# Altium PCB LoRa_Node.PcbDoc
Units mil, origin at the board's own origin, x right, y up, seen from the top; angles counter-clockwise.
Board outline 6000 x 4000 mil, 2 copper layers (Top Layer, Bottom Layer); 76 components, 60 nets, 297 pads, 0 vias.
Unrouted connection lines stored in the file: 200.
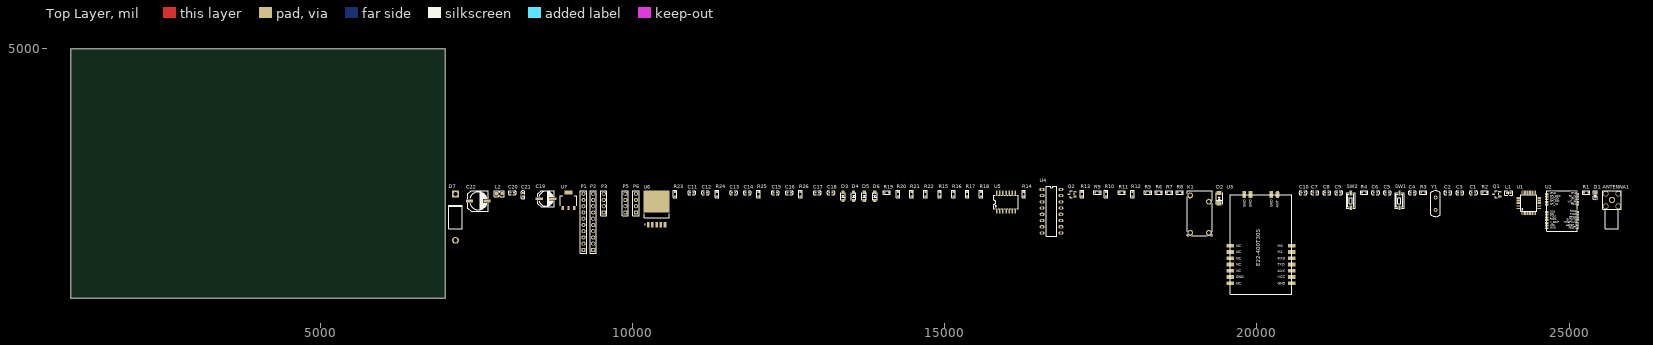
[diagram p0: Top Layer view]
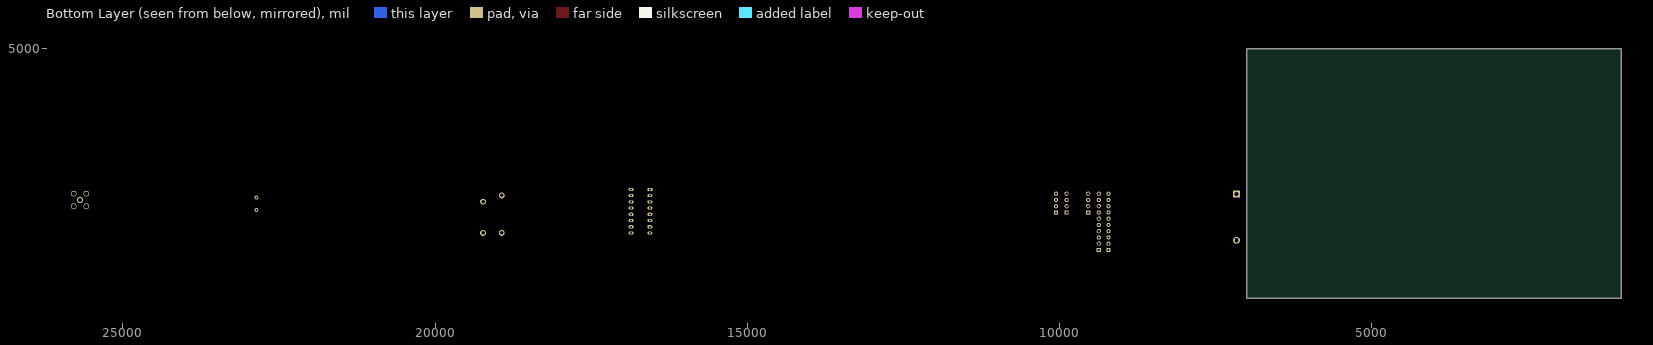
[diagram p1: Bottom Layer view, seen from below]

## Layer stack, top to bottom
Top Solder: solder mask 0.4, Solder Resist, Dk 3.5
Top Layer: signal copper 1.4
Dielectric 1: dielectric 12.6, FR-4, Dk 4.8
Bottom Layer: signal copper 1.4
Bottom Solder: solder mask 0.4, Solder Resist, Dk 3.5

## Board outline
1000,1000 7000,1000 7000,5000 1000,5000

## Design rules (kind name [scope] priority, off if disabled: settings)
Clearance [All] p1: gap=10 ignorepadtopadclearanceinfootprint=FALSE except(0: Arc-Hole Track-Hole SMDPad-Hole THPad-Hole Via-Hole Fill-Hole Poly-Hole Region-Hole Text-Hole)
PolygonConnect [All] p1: connectstyle=Relief reliefconductorwidth=10 reliefentries=4 polygonreliefangle="90 Angle" airgapwidth=10
RoomDefinition LoRa_Node [InComponentClass('LoRa_Node')] p1: confinementstyle=ConfineIn formatcopy=TRUE lockcomponents=FALSE outline 7045,1060 25995,1060 25995,2835 7045,2835
RoutingVias [All] p1: holewidth=28 width=50 viastyle="Through Hole" minholewidth=28 minwidth=50 maxholewidth=28 maxwidth=50
SolderMaskExpansion [All] p1: expansion=4
Width [All] p1: maxlimit=10 minlimit=10 preferedwidth=10
30 further rules are at their usual default settings.

## Components (designator, comment, footprint, x,y, rotation, side; value= is the part's Value field where it differs from the comment)
ANTENNA1 "Active antenna" SMA-W 25685,2575 r90 top
C1 "Cap8" 0603C 23445,2690 r0 top value=20pF
C2 "Cap15" 0603C 23035,2690 r0 top value=10uF
C3 "Cap16" 0603C 23225,2690 r0 top value=100nF
C4 "Cap17" 0603C 22465,2690 r0 top value=100nF
C5 "Cap9" 0603C 22065,2690 r0 top value=20pF
C6 "Cap18" 0603C 21875,2690 r0 top value=100nF
C7 "Cap11" 0603C 20905,2690 r0 top value=0.1uF
C8 "Cap12" 0603C 21095,2690 r0 top value=0.1uF
C9 "Cap13" 0603C 21285,2690 r0 top value=0.1uF
C10 "Cap10" 0603C 20715,2690 r0 top value=100nF
C11 "" 0603C 10925,2690 r0 top value=10uF
C12 "Cap" 0603C 11145,2690 r0 top value=0.01uF
C13 "" 0603C 11595,2690 r0 top value=10uF
C14 "Cap" 0603C 11815,2690 r0 top value=0.01uF
C15 "" 0603C 12265,2690 r0 top value=10uF
C16 "Cap" 0603C 12485,2690 r0 top value=0.01uF
C17 "" 0603C 12935,2690 r0 top value=10uF
C18 "Cap" 0603C 13155,2690 r0 top value=0.01uF
C19 "100uF" 100uF-16V 8415,2465 r0 top
C20 "" 0603C 8050,2690 r0 top value=10uF
C21 "" 0603C 8245,2635 r90 top value=10uF
C22 "1000uF" 1000uF-6.3V 7280,2410 r0 top
D1 "LED1" D0603 25415,2655 r90 top
D2 "S-SZA12A" S-SZA12A 19450,2450 r90 top
D3 "SM2T3V3A" 3.3V稳压二极管(LMSZ5226BT1G) 13415,2490 r90 top
D4 "SM2T3V3A" 3.3V稳压二极管(LMSZ5226BT1G) 13585,2490 r90 top
D5 "SM2T3V3A" 3.3V稳压二极管(LMSZ5226BT1G) 13755,2490 r90 top
D6 "SM2T3V3A" 3.3V稳压二极管(LMSZ5226BT1G) 13925,2490 r90 top
D7 "1N5822" DO-201AD 7165,2300 r90 top
K1 "32F/012-HS(551)" 32F/012-HS（551） 19345,1870 r90 top
L1 "Inductor3" 0603L 24010,2685 r0 top value=68nH
L2 "Inductor" L0805 7825,2675 r0 top value=100uH
P1 "A-R" HDR2.54-LI-10P 9215,2225 r90 top
P2 "D-V" HDR2.54-LI-10P 9370,2225 r90 top
P3 "Header 4" HDR2.54-LI-4P 9540,2525 r90 top
P5 "LoRa" HDR2.54-LI-4P 9885,2525 r90 top
P6 "GPS" HDR2.54-LI-4P 10055,2525 r90 top
Q1 "SI2302" FMMT493 23715,2605 r0 top
Q2 "FMMT493" FMMT493 16915,2605 r0 top
R1 "Res11" 0603R 25270,2695 r0 top value=510
R2 "Res9" 0603R 23650,2695 r0 top value=10K
R3 "Res8" 0603R 22665,2695 r0 top value=1M
R4 "Res10" 0603R 21715,2695 r0 top value=100K
R5 "Res1" 0603R 18255,2695 r0 top value=0
R6 "Res1" 0603R 18425,2695 r0 top value=0
R7 "Res1" 0603R 18595,2695 r0 top value=0
R8 "Res1" 0603R 18765,2695 r0 top value=0
R9 "Res1" 0603R 17445,2695 r0 top value=47
R10 "Res1" 0603R 17585,2670 r90 top value=47
R11 "Res1" 0603R 17835,2695 r0 top value=47
R12 "Res1" 0603R 18005,2670 r90 top value=47
R13 "Res11" 0603R 17195,2670 r90 top value=10K
R14 "Res11" 0603R 16265,2670 r90 top value=2K
R15 "Res1" 0603R 14920,2670 r90 top value=2K
R16 "Res1" 0603R 15140,2670 r90 top value=1M
R17 "Res1" 0603R 15360,2670 r90 top value=1M
R18 "Res1" 0603R 15580,2670 r90 top value=1M
R19 "Res1" 0603R 14070,2695 r0 top value=510
R20 "Res1" 0603R 14250,2670 r90 top value=510
R21 "Res1" 0603R 14470,2670 r90 top value=510
R22 "Res1" 0603R 14690,2670 r90 top value=510
R23 "Res1" 0603R 10680,2670 r90 top value=2K
R24 "Res1" 0603R 11350,2670 r90 top value=1M
R25 "Res1" 0603R 12020,2670 r90 top value=150K
R26 "Res1" 0603R 12690,2670 r90 top value=82K
SW1 "SW-1" SW-1 22280,2565 r90 top
SW2 "SW-1" SW-1 21500,2565 r90 top
U1 "STM32F103C8T6" stm32l151c8t6 24150,2360 r0 top
U2 "UM220-III N" UM220-III 25350,2300 r0 top
U3 "E22-400T30S" PE32(915T30S) 20555,1840 r90 top
U4 "TIL193" DIP16 16560,2745 r0 top
U5 "LM324AN" LM324AN 15710,2345 r0 top
U6 "LM2576SX-5.0/NOPB" LM2576SX-5.0/NOPB 10650,2140 r90 top
U7 "ASM1117-3.3V" SOT-223 8885,2445 r0 top
Y1 "8MHz" XTAL 22860,2410 r90 top

## Footprints (in the part's own frame and the unit in brackets; to place one, negate y for a bottom-side part, rotate by r counter-clockwise, add the part's x,y. Pads: shape width x height; smd on the part's side, far side on the other; paste and mask are expansions set on the pad)
3.3V稳压二极管(LMSZ5226BT1G) [mm]
  rect 1.3x1.3 smd: 1(1.92,1.154) 2(5.32,1.154)
  silkscreen extent 2.12,0.25 5.12,2.05
32F/012-HS（551） [mil]
  round 94.49 hole 55.12: 1(177.2,114.72) 2(177.2,413.92) 3(777.2,414.72) 4(677.2,114.72)
  silkscreen extent 129,64 854,465
100uF-16V [mm]
  rect 3x1 smd: 1(2.262,3.299) 2(7.862,3.299)
  silkscreen extent 1.77,0 8.36,6.6
0603C [mil]
  rect 30x30 smd: 1(-5,0) 2(50,0)
  silkscreen extent -42,-30 87,30
0603L [mil]
  rect 30x30 smd: 1(-5,0) 2(50,0)
  silkscreen extent -40,-35 85,35
0603R [mm]
  rect 0.762x0.9 smd: 1(-0.9,0)
  rect 0.8x0.9 smd: 2(0.9,0)
  silkscreen extent -1.45,-0.7 1.45,0.7, body extent -0.85,-0.4 0.85,0.4, height 0.56
1000uF-6.3V [mil]
  rect 114.2x47.2 smd: 1(112.1,148.8) 2(387.7,148.4)
  silkscreen extent 84,-15 411,312
D0603 [mm]
  rect 1x1 smd: 1(-0.94,0) 2(0.889,0)
  silkscreen extent -1.7,-0.76 1.65,0.76, body extent -1.03,-0.53 0.99,0.53, height 0.46
DIP16 [mil] "16脚300mil直插集成电路（蒜米工坊）"
  rect 80x50 hole 32: 1(0,0)
  oval 80x50 hole 32: 2(0,-100) 3(0,-200) 4(0,-300) 5(0,-400) 6(0,-500) 7(0,-600) 8(0,-700) 9(300,-700) 10(300,-600) 11(300,-500) 12(300,-400) 13(300,-300) 14(300,-200) 15(300,-100) 16(300,0)
  silkscreen extent 65,-750 235,50, body extent -8,-732 300,32, height 180
DO-201AD [mm] "Diode, Axial; Body 9.5 x 5.6 mm (LxDia. max), Lead Dia. 1.32 mm (max)"
  round 2.8 hole 1.7: 1(-9.42,0)
  rect 2.8x2.8 hole 1.7: 2(9.42,0)
  silkscreen extent -4.8,-2.8 4.9,2.8
FMMT493 [mm]
  rect 1.25x0.7 smd: 1(4.394,0.637) 2(4.394,2.537) 3(1.895,1.587)
  silkscreen extent 2.49,0.13 4.04,3.05
HDR2.54-LI-4P [mm] "排针，4脚"
  rect 1.7x1.7 hole 0.9: 1(-3.81,0)
  round 1.7 hole 0.9: 2(-1.27,0) 3(1.27,0) 4(3.81,0)
  silkscreen extent -5.08,-1.27 5.08,1.27, body extent -5.08,-1.27 5.08,1.27, height 8.5
HDR2.54-LI-10P [mm] "排针，10脚"
  rect 1.7x1.7 hole 0.9: 1(-11.43,0)
  round 1.7 hole 0.9: 2(-8.89,0) 3(-6.35,0) 4(-3.81,0) 5(-1.27,0) 6(1.27,0) 7(3.81,0) 8(6.35,0) 9(8.89,0) 10(11.43,0)
  silkscreen extent -12.7,-1.27 12.7,1.27, body extent -12.7,-1.27 12.7,1.27, height 8.5
L0805 [mil] "1/8W"
  rect 50x50 smd: 1(0,0) 2(82.3,0.2)
  silkscreen extent -40,-45 122,45, body extent 1,-24 80,25, height 22
LM324AN [mm]
  oval 0.6x2.198 smd: 1(3.095,1.353) 2(4.365,1.353) 3(5.635,1.353) 4(6.905,1.353) 5(8.175,1.353) 6(9.445,1.353) 7(10.715,1.353) 8(10.715,8.553) 9(9.445,8.553) 10(8.175,8.553) 11(6.905,8.553) 12(5.635,8.553) 13(4.365,8.553) 14(3.095,8.553)
  silkscreen extent 1.91,2.2 11.91,7.7
LM2576SX-5.0/NOPB [mil]
  rect 90x42.1 smd: 1(40,398.84) 2(40,331.84) 3(40,264.84) 4(40,197.84) 5(40,130.84)
  rect 350x419.68 smd: 6(407.54,264.84)
  silkscreen extent 36,65 212,465
PE32(915T30S) [mm] "40.5mm*25mm*3.80mm-S"
  rect 1.5x3 smd: 1(0,0) 2(-2.54,0) 3(-5.08,0) 4(-7.62,0) 5(-10.16,0) 6(-12.7,0) 7(-15.24,0) 8(-15.24,25) 9(-12.7,25) 10(-10.16,25) 11(-7.62,25) 12(-5.08,25) 13(-2.54,25) 14(0,25)
  rect 3x1.5 smd: 15(20.88,19.27) 16(20.88,16.73) 17(20.88,8.27)
  oval 3x1.5 smd: 18(20.88,5.73)
  silkscreen extent -19.62,0 20.88,25
S-SZA12A [mm]
  rect 1.8x2 smd: 1(1.789,1.4) 2(5.989,1.4)
  silkscreen extent 1.59,0 6.19,2.8
SMA-W [mil]
  round 100 hole 70: 1(0,0)
  round 90 hole 70: 2(-100,-100) 2(-100,100) 2(100,-100) 2(100,100)
  silkscreen extent -460,-152 148,151, body extent -460,-140 135,136, height 108
SOT-223 [mil]
  rect 39x59 smd: 1(0,0) 3(180,0)
  rect 38.98x59.05 smd: 2(90,0)
  rect 129.13x59 smd: 4(90,248.03)
  silkscreen extent -40,40 220,200
stm32l151c8t6 [mm]
  oval 0.3x1.5 smd: 1(2.377,-0.012) 2(2.877,-0.012) 3(3.377,-0.012) 4(3.877,-0.012) 5(4.377,-0.012) 6(4.877,-0.012) 7(5.377,-0.012) 8(5.877,-0.012) 9(6.377,-0.012) 10(6.877,-0.012) 11(7.377,-0.012) 12(7.877,-0.012) 25(7.877,8.488) 26(7.377,8.488) 27(6.877,8.488) 28(6.377,8.488) 29(5.877,8.488) 30(5.377,8.488) 31(4.877,8.488) 32(4.377,8.488) 33(3.877,8.488) 34(3.377,8.488) 35(2.877,8.488) 36(2.377,8.488)
  oval 1.5x0.3 smd: 13(9.377,1.488) 14(9.377,1.988) 15(9.377,2.488) 16(9.377,2.988) 17(9.377,3.488) 18(9.377,3.988) 19(9.377,4.488) 20(9.377,4.988) 21(9.377,5.488) 22(9.377,5.988) 23(9.377,6.488) 24(9.377,6.988) 37(0.877,6.988) 38(0.877,6.488) 39(0.877,5.988) 40(0.877,5.488) 41(0.877,4.988) 42(0.877,4.488) 43(0.877,3.988) 44(0.877,3.488) 45(0.877,2.988) 46(0.877,2.488) 47(0.877,1.988) 48(0.877,1.488)
  silkscreen extent 1.8,0.92 8.43,7.58
SW-1 [mm]
  rect 2x1 smd: 1(-2.937,-0.055) 2(3.063,-0.055)
  silkscreen extent -3.04,-1.9 3.16,1.8
UM220-III [mm]
  rect 1.5x0.8 smd: 1(-5.634,-4.527) 2(-5.634,-3.427) 3(-5.634,-2.327) 4(-5.634,-1.227) 5(-5.634,-0.127) 6(-5.634,0.973) 7(-5.634,2.073) 8(-5.634,5.073) 9(-5.634,6.173) 10(-5.634,7.273) 11(-5.634,8.373) 12(-5.634,9.473) 13(-18.034,9.473) 14(-18.034,8.373) 15(-18.034,7.273) 16(-18.034,6.173) 17(-18.034,5.073) 18(-18.034,2.073) 19(-18.034,0.973) 20(-18.034,-0.127) 21(-18.034,-1.227) 22(-18.034,-2.327) 23(-18.034,-3.427) 24(-18.034,-4.527)
  silkscreen extent -18.03,-5.73 -5.63,10.67
XTAL [mil]
  round 62 hole 32: 1(5,0) 2(205,0)
  silkscreen extent -101,-75 311,75

## Part data
C1 C2 C3 C4 C5 C6 C7 C8 C9 C10: library part Cap, "Capacitor", LatestRevisionDate=17-Jul-2002, LatestRevisionNote="Re-released for DXP Platform.", PackageDescription="Radial Cap, Thru-Hole; 2 Leads; 0.3 in Pin Spacing", PackageReference=RAD-0.3, Published=8-Jun-2000, Publisher="Altium Limited"
C11 C13 C15 C17 C20 C21: library part "Cap Pol1", "Polarized Capacitor (Radial)", LatestRevisionDate=17-Jul-2002, LatestRevisionNote="Re-released for DXP Platform.", PackageDescription="Polarized Capacitor (Radial); 2 Leads", PackageReference=RB7.6-15, Published=8-Jun-2000, Publisher="Altium Limited"
C12 C14 C16 C18: "无极性电容", LatestRevisionDate=17-Jul-2002, LatestRevisionNote="Re-released for DXP Platform.", PackageReference=RAD-0.3, Published=8-Jun-2000, Publisher="Altium Limited"
C19 C22: library part "Cap Pol2", "Polarized Capacitor (Axial)", LatestRevisionDate=17-Jul-2002, LatestRevisionNote="Re-released for DXP Platform.", PackageDescription="Polarized Capacitor; 2 Leads", PackageReference=POLAR0.8, Published=8-Jun-2000, Publisher="Altium Limited"
D1: "Typical RED GaAs LED", LatestRevisionDate=08-Jul-2005, LatestRevisionNote="Mech Layer 1 removed.", PackageDescription="LED; 2 Leads", PackageReference=LED-1, Published=8-Jun-2000, Publisher="Altium Limited"
D2: library part "D Zener", "Zener Diode", LatestRevisionDate=17-Jul-2002, LatestRevisionNote="Re-released for DXP Platform.", PackageDescription="Diode, Thru-Hole; 2 Leads; 0.7 in Pin Spacing", PackageReference=DIODE-0.7, Published=8-Jun-2000, Publisher="Altium Limited"
D3 D4 D5 D6: library part "Diode 10TQ035", "Schottky Rectifier", ComponentLink1Description="Manufacturer Link", ComponentLink1URL=http://www.irf.com/, ComponentLink2Description=Datasheet, ComponentLink2URL=http://www.irf.com/product-info/datasheets/data/10tq.pdf, DatasheetVersion=PD-2.057B, LatestRevisionDate=17-Jul-2002, LatestRevisionNote="Re-released for DXP Platform.", Note="Terminal 2 is the TAB and is electrically connected to the cathode", PackageDescription="TO, Thru-Hole, Vertical, Heatsink Mounted; 3 In-Line Leads (1 Absent); Pitch 2.54 mm", PackageReference=TO-220AC, PackageVersion=Feb-1998, Published=8-Jun-2000, Publisher="Altium Limited"
D7: library part "Diode 1N5408", "3 Amp Medium Power Silicon Rectifier Diode", ComponentLink1Description="Manufacturer Link", ComponentLink1URL=http://www.irf.com/, DatasheetVersion=Aug-1984, LatestRevisionDate=17-Jul-2002, LatestRevisionNote="Re-released for DXP Platform.", PackageDescription="Diode, Axial; Body 9.5 x 5.3 mm (LxDia. max), Lead Dia. 1.32 mm (max)", PackageReference=DO-201AD, Published=8-Jun-2000, Publisher="Altium Limited"
L1: library part Inductor, "Inductor", Code_IEC=1005, Code_JEITA=0402, LatestRevisionDate=29-May-2009, LatestRevisionNote="IPC-7351 Footprint Added.", PackageDescription="Chip Inductor", PackageReference=0402-A, Published=8-Jun-2000, Publisher="Altium Limited"
L2: "电感", Code_IEC=1005, Code_JEITA=0402, LatestRevisionDate=17-Jul-2002, LatestRevisionNote="Re-released for DXP Platform.", PackageReference=0402-A, Published=8-Jun-2000, Publisher="Altium Limited"
P1 P2: library part MHDR1X10, "Header, 10-Pin", LatestRevisionDate=17-Jul-2002, LatestRevisionNote="Re-released for DXP Platform.", Publisher="Altium Limited"
P3: "接插件", LatestRevisionDate=17-Jul-2002, LatestRevisionNote="Re-released for DXP Platform.", Publisher="Altium Limited"
P5 P6: library part "Header 4", "Header, 4-Pin", LatestRevisionDate=17-Jul-2002, LatestRevisionNote="Re-released for DXP Platform.", Publisher="Altium Limited"
Q1: library part MOSFET-N, "N-Channel MOSFET", LatestRevisionDate=17-Jul-2002, LatestRevisionNote="Re-released for DXP Platform.", PackageDescription="TO, Flat Index; 3 In-Line, Axial Leads; Body Dia. 4.6mm; Lead Dia. 0.5 mm (max)", PackageReference=E3, PackageVersion=1995/1996, Published=8-Jun-2000, Publisher="Altium Limited"
Q2: library part S8050, "NPN三极管", PackageDocument=Sep-1998, Code_JEDEC=TO-92A, ComponentLink1Description="Manufacturer Link", ComponentLink1URL=http://www.fairchildsemi.com/, ComponentLink2Description=Datasheet, ComponentLink2URL=http://www.fairchildsemi.com/ds/2N%2F2N3904.pdf, DatasheetDocument=1997, LatestRevisionDate=15-Jan-2003, LatestRevisionNote="PCB Footprint 'BCY-W3/D4.7' replaced", PackageReference=TO-92A, Published=8-Jun-2000, Publisher="Altium Limited"
R1 R2 R3 R4 R13 R14: library part Res2, "Resistor", LatestRevisionDate=17-Jul-2002, LatestRevisionNote="Re-released for DXP Platform.", PackageDescription="Axial Device, Thru-Hole; 2 Leads; 0.4 in Pin Spacing", PackageReference=AXIAL-0.4, Published=8-Jun-2000, Publisher="Altium Limited"
R5 R6 R7 R8 R9 R10 R11 R12 R15 R16 R17 R18 R19 R20 R21 R22 R23 R24 R25 R26: "贴片电阻", LatestRevisionDate=17-Jul-2002, LatestRevisionNote="Re-released for DXP Platform.", PackageReference=AXIAL-0.4, Published=8-Jun-2000, Publisher="Altium Limited"
U4: library part TIL93
U7: library part ASM1117, "3.3V稳压芯片"
Y1: library part XTAL, "Crystal Oscillator", LatestRevisionDate=17-Jul-2002, LatestRevisionNote="Re-released for DXP Platform.", PackageDescription="Crystal, Thru-Hole; 2 Leads; Body 3.1 x 8.2 mm (Dia.xH)", PackageReference=R38, Published=8-Jun-2000, Publisher="Altium Limited"

## Nets (pads, with @x,y where several pads share a name; then routed paths per layer and width w, separated by ;. In a path a pad name is that pad's centre, name@x,y a point inside that pad or via, vN(x,y) a via of type N, cw(c..) or ccw(c..) an arc to the next point about the centre after c; other vN are vias at no path point)
+3.3V: C2.1 C3.1 C7.1 C8.1 C9.1 C21.1 P3.1 Q1.3 R1.1 R4.2 R5.2 R6.2 R7.2 R8.2 R9.2 R10.2 R11.2 R12.2 U1.1 U1.9 U1.24 U1.36 U1.48 U5.4 U7.2
+5V: C20.1 C22.1 L2.2 P2.6 P2.10 P5.1 U3.6 U6.4 U7.3
+12V: C19.1 D2.1 K1.2 P1.10 U6.1
ADC1: C11.1 C12.2 D3.1 U1.14 U5.1 U5.2
ADC2: C13.1 C14.2 D4.1 U1.15 U5.6 U5.7
ADC3: C15.1 C16.2 D5.1 U1.16 U5.8 U5.9
ADC4: C17.1 C18.2 D6.1 U1.17 U5.13 U5.14
ADCIN1: P1.1 R15.2
ADCIN2: P1.2 R16.2
ADCIN3: P1.3 R17.2
ADCIN4: P1.4 R18.2
DI1: P2.1 U4.4
DI1_IO: R6.1 U1.28 U4.14
DI2: P2.2 U4.2
DI2_IO: R5.1 U1.27 U4.16
DO1: P2.3 R8.1 U4.10
DO1_IO: U1.26 U4.8
DO2: P2.4 R7.1 U4.12
DO2_IO: U1.25 U4.6
GND: ANTENNA1.2 C1.2 C2.2 C3.2 C4.2 C5.2 C6.2 C7.2 C8.2 C9.2 C10.2 C11.2 C12.1 C13.2 C14.1 C15.2 C16.1 C17.2 C18.1 C19.2 C20.2 C21.2 C22.2 D3.2 D4.2 D5.2 D6.2 D7.1 P1.5 P1.8 P1.9 P2.5 P2.7 P3.2 P5.4 P6.4 Q2.2 R2.2 R14.2 R23.1 R24.1 R25.1 R26.1 SW1.2 SW2.2 U1.8 U1.23 U1.35 U1.47 U2.10 U2.12 U2.13 U2.24 U3.7 U3.15 U3.16 U3.17 U4.9 U4.11 U4.13 U4.15 U5.11 U6.3 U6.5 U7.1
GPS_EN: Q1.1 U1.11
GPS_RST: U1.18 U2.1
GPS_RXD: P6.3 U1.12 U2.21
GPS_TXD: P6.2 U1.13 U2.20
GPS_VCC: P6.1 Q1.2 U2.23
KEY: SW1.1 U1.45
LED: D1.2 U1.46
LoRa_RXD: P5.3 U1.21 U3.3
LoRa_TXD: P5.2 U1.22 U3.4
M0: U1.19 U3.1
M1: U1.20 U3.2
NetANTENNA1_1: ANTENNA1.1 L1.2 U2.11
NetC1_1: C1.1 R3.2 U1.5 Y1.2
NetC4_1: C4.1 C6.1 L1.1 U2.9
NetC5_1: C5.1 R3.1 U1.6 Y1.1
NetD1_1: D1.1 R1.2
NetD2_2: D2.2 K1.1 Q2.3
NetD7_2: D7.2 L2.1 U6.2
NetQ2_1: Q2.1 R13.1 R14.1
NetR2_1: R2.1 U1.44
NetR9_1: R9.1 U4.1
NetR10_1: R10.1 U4.3
NetR11_1: R11.1 U4.5
NetR12_1: R12.1 U4.7
NetR15_1: R15.1 R19.2 R23.2
NetR16_1: R16.1 R20.2 R24.2
NetR17_1: R17.1 R21.2 R25.2
NetR18_1: R18.1 R22.2 R26.2
NetR19_1: R19.1 U5.3
NetR20_1: R20.1 U5.5
NetR21_1: R21.1 U5.10
NetR22_1: R22.1 U5.12
NRST: C10.1 R4.1 SW2.1 U1.7
Relay_IN: K1.4 P1.6
Relay_IO: R13.2 U1.41
Relay_OUT: K1.3 P1.7
RXD1: P2.9 U1.31
SWCLK: P3.4 U1.37
SWDIO: P3.3 U1.34
TXD1: P2.8 U1.30
pads on no net: U1.2 U1.3 U1.4 U1.10 U1.29 U1.32 U1.33 U1.38 U1.39 U1.40 U1.42 U1.43 U2.2 U2.3 U2.4 U2.5 U2.6 U2.7 U2.8 U2.14 U2.15 U2.16 U2.17 U2.18 U2.19 U2.22 U3.5 U3.8 U3.9 U3.10 U3.11 U3.12 U3.13 U3.14 U3.18 U6.6 U7.4

## Text inside footprints (layer, text, board x,y; h text height)
D1: Top Overlay "+" at 25430,2560 h30 r90
U2: Top Overlay "GND" at 24693.19,2114.53 h19.68; Top Overlay "VCC" at 24693.19,2154.53 h19.68; Top Overlay "V_BCKP" at 24693.19,2204.53 h19.68; Top Overlay "RXD1" at 24693.19,2249.53 h19.68; Top Overlay "TXD1" at 24693.19,2289.53 h19.68; Top Overlay "SCL" at 24693.19,2329.53 h19.68; Top Overlay "SDA" at 24693.19,2369.53 h19.68; Top Overlay "SPI_CS" at 24693.19,2489.53 h19.68; Top Overlay "SPI_SCK" at 24693.19,2534.53 h19.68; Top Overlay "SPI_SDI" at 24693.19,2574.53 h19.68; Top Overlay "SPI_SDO" at 24693.19,2619.53 h19.68; Top Overlay "GND" at 24693.19,2664.53 h19.68; Top Overlay "GND" at 25033.19,2664.53 h19.68; Top Overlay "RF_IN" at 24997.11,2619.53 h19.68; Top Overlay "GND" at 25033.19,2574.53 h19.68; Top Overlay "VCC_RF" at 24974.15,2529.53 h19.68; Top Overlay "RSV" at 25033.19,2489.53 h19.68; Top Overlay "RXD2" at 25013.51,2374.53 h19.68; Top Overlay "TXD2" at 25013.51,2329.53 h19.68; Top Overlay "GPIO2" at 24997.11,2284.53 h19.68; Top Overlay "EXTINT0" at 24957.75,2239.53 h19.68; Top Overlay "TIMEPULSE" at 24918.4,2199.53 h19.68; Top Overlay "AADET_N" at 24954.47,2154.53 h19.68; Top Overlay "RESET" at 24993.83,2114.53 h19.68
U3: Top Overlay "GND" at 20251.06,2454.25 h39.37 r90; Top Overlay "ANT" at 20351.46,2452.38 h39.37 r90; Top Overlay "M0" at 20335.51,1817.28 h39.37; Top Overlay "M1" at 20335.51,1718.46 h39.37; Top Overlay "RXD" at 20335.51,1618.07 h39.37; Top Overlay "TXD" at 20335.51,1518.46 h39.37; Top Overlay "AUX" at 20335.51,1418.46 h39.37; Top Overlay "VCC" at 20335.51,1318.07 h39.37; Top Overlay "GND" at 20335.51,1216.1 h39.37; Top Overlay "NC" at 19665.55,1216.89 h39.37; Top Overlay "GND" at 19665.55,1318.86 h39.37; Top Overlay "NC" at 19665.55,1519.25 h39.37; Top Overlay "NC" at 19665.55,1618.86 h39.37; Top Overlay "NC" at 19665.55,1719.25 h39.37; Top Overlay "NC" at 19665.55,1818.07 h39.37; Top Overlay "GND" at 19916.42,2454.25 h39.37 r90; Top Overlay "GND" at 19817.6,2454.25 h39.37 r90; Top Overlay "NC" at 19665,1417.56 h39.37